# EAGLE board skyshieldv2.2 (EAGLE 7.2.0)
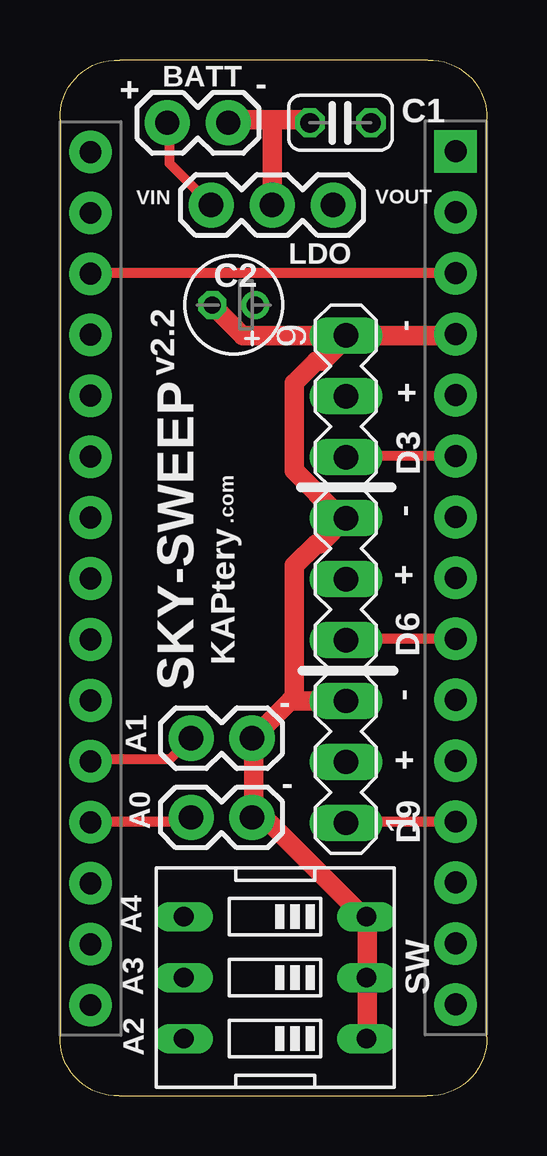
[diagram p0: board, top side]
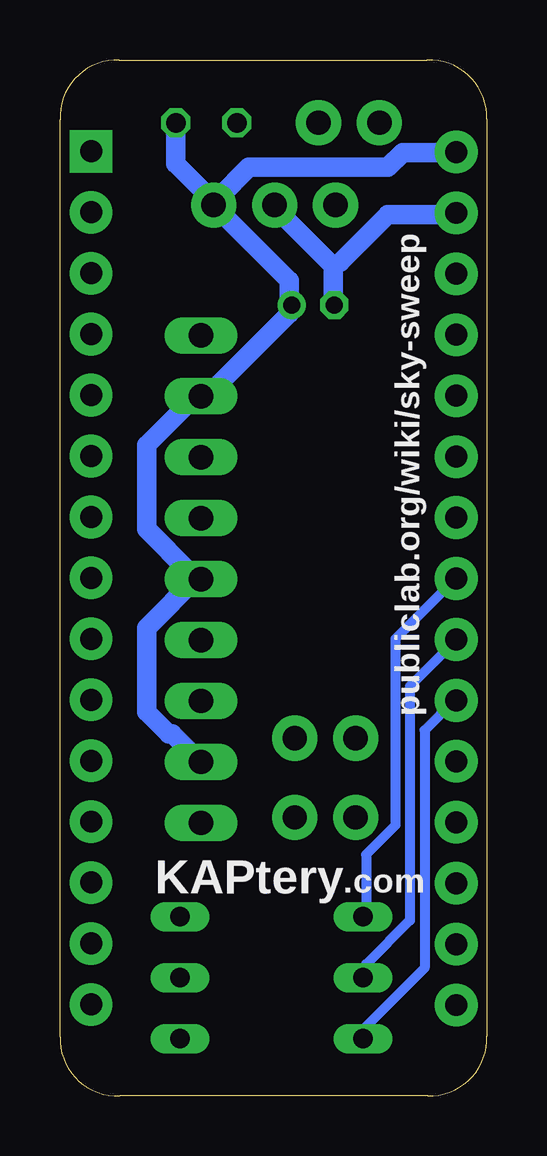
[diagram p1: board, bottom side, seen from below]

Size 17.78 x 43.18 mm. Coordinates in mm from the lower left corner, seen from the top.
Outline: 2.46,0 15.29,0 arc94 17.78,2.46 17.78,40.69 arc94 15.32,43.18 2.49,43.18 arc94 0,40.72 0,2.49 arc94 2.46,0
Copper layers (1*16): Top 0.0356mm / dielectric 1.5011mm / Bottom 0.0356mm
Design rules "LaenPCBOrder": minimum track width 6mil, minimum drill 13mil, track to track 6mil, track to pad 6mil, pad to pad 6mil, via to via 6mil, smd to smd 6mil, copper to edge 15mil, drill to drill 6mil, minimum pad ring 7mil, minimum via ring 7mil, stop-mask expansion 3mil, vias tented up to drill 0mil, thermal gap 10mil
Net classes: 0 default: width 0.406 mm, clearance 0.203 mm; 1 power: width 0.813 mm, clearance 0.203 mm

## Footprints (pad centres in the part's own frame; a part is rotated, then mirrored left to right if it is on the bottom)
1X02 = drill 1.016 pad 1.88: 1 0,0; 2 2.54,0
C025-024X044 = drill 0.813 octagon: 1 -1.27,0; 2 1.27,0
E1,8-4 = drill 0.711 pad 1.168: + -0.889,0 | drill 0.711 pad 1.168 octagon: - 0.889,0
HEAD15-NOSS = drill 0.914 pad 1.778 square: 1 0,0 | drill 0.914 pad 1.778: 2 2.54,0; 3 5.08,0; 4 7.62,0; 5 10.16,0; 6 12.7,0; 7 15.24,0; 8 17.78,0; 9 20.32,0; 10 22.86,0; 11 25.4,0; 12 27.94,0; 13 30.48,0; 14 33.02,0; 15 35.56,0
HEAD15-NOSS-1 = drill 0.914 pad 1.778: 1 0,0; 2 2.54,0; 3 5.08,0; 4 7.62,0; 5 10.16,0; 6 12.7,0; 7 15.24,0; 8 17.78,0; 9 20.32,0; 10 22.86,0; 11 25.4,0; 12 27.94,0; 13 30.48,0; 14 33.02,0; 15 35.56,0
1X03 = drill 1.016 pad 1.88: 1 0,0; 2 2.54,0; 3 5.08,0
MA09-1 = drill 1.016 long: 1 -10.16,0; 2 -7.62,0; 3 -5.08,0; 4 -2.54,0; 5 0,0; 6 2.54,0; 7 5.08,0; 8 7.62,0; 9 10.16,0
EDG-03 = drill 0.813 long: 1 -2.54,-3.81; 2 0,-3.81; 3 2.54,-3.81; 4 2.54,3.81; 5 0,3.81; 6 -2.54,3.81

## Placement (x,y rotation side)
BATT  [1X02]  4.47,40.56 0 top
C1  0.1µ  [C025-024X044]  11.68,40.56 180 top
C2  10µ  [E1,8-4]  7.24,32.97 180 top
CHDKA  [1X02]  8,11.61 180 top
CHDKB  [1X02]  8,14.91 180 top
J1  HEAD15-NOSS  [HEAD15-NOSS]  16.48,39.37 270 top
J2  HEAD15-NOSS-1  [HEAD15-NOSS-1]  1.27,39.34 270 top
LDO-5V  LF50ABV-DG  [1X03]  11.38,37.13 180 top
SV4  [MA09-1]  11.91,21.54 90 top
SW2  [EDG-03]  8.97,4.93 90 top

## Library data of the parts
BATT CHDKA CHDKB LDO-5V = SparkFun-Connectors
C1 C2 = resistor
J1 J2 = MyCON2
SV4 = con-lstb; OC_FARNELL: unknown; OC_NEWARK: unknown
SW2 = special

## Nets
3V3: J2.14
+5V: J2.4
A0: CHDKA.2 J2.12
A1: CHDKB.2 J2.11
A2: J2.10 SW2.6
A3: J2.9 SW2.5
A4: J2.8 SW2.4
A5: J2.7
A6: J2.6
A7: J2.5
AREF: J2.13
D0/RX: J1.2
D1/TX: J1.1
D2: J1.5
D3: J1.6 SV4.7
D4: J1.7
D5: J1.8
D6: J1.9 SV4.4
D7: J1.10
D8: J1.11
D9: J1.12 SV4.1
D10: J1.13
D11/MOSI: J1.14
D12/MISO: J1.15
D13/SCK: J2.15
GND [power]: BATT.2 C1.2 C2.- CHDKA.1 CHDKB.1 J1.4 J2.2 LDO-5V.2 SV4.3 SV4.6 SV4.9 SW2.1 SW2.2 SW2.3
N$6: BATT.1 LDO-5V.3
RESET: J1.3 J2.3
VCC [power]: C1.1 C2.+ J2.1 LDO-5V.1 SV4.2 SV4.5 SV4.8

## Tracks (layer width: path | path; a pad name or v marks a point on that pad's centre or on a via)
A0
  Top 0.406: J2.12 1.37,11.43 5.18,11.43 5.33,11.58 CHDKA.2
A1
  Top 0.406: CHDKB.2 4.57,14.02 1.37,14.02 J2.11
A2
  Bottom 0.406: SW2.6 5.03,2.44 5.03,2.9 2.59,5.33 2.59,15.24 1.37,16.46 J2.10
A3
  Bottom 0.406: SW2.5 5.03,5.03 5.03,5.49 3.2,7.32 3.2,17.07 1.37,18.9 J2.9
A4
  Bottom 0.406: SW2.4 5.03,7.47 5.03,10.06 3.81,11.28 3.81,19.05 1.37,21.49 J2.8
D3
  Top 0.406: J1.6 12.04,26.67 SV4.7
D6
  Top 0.406: J1.9 12.04,19.05 SV4.4
D9
  Top 0.406: J1.12 12.04,11.43 SV4.1
GND
  Top 0.813: SV4.9 16.46,31.7 J1.4 | 8.84,40.69 7.01,40.69 BATT.2 | 8.84,40.69 10.36,40.69 C1.2 | LDO-5V.2 8.84,40.69 | SV4.9 7.62,31.7 C2.- | SW2.1 12.8,2.44 12.8,4.88 SW2.2 12.8,5.33 12.8,7.47 SW2.3 12.5,7.62 8.38,11.73 CHDKA.1 8.08,11.73 8.08,14.63 CHDKB.1 8.08,14.94 9.6,16.46 9.75,16.46 | 9.75,16.46 SV4.3 | 9.75,16.46 9.75,22.1 10.67,23.01 10.82,23.01 11.89,24.08 SV4.6 11.58,24.23 9.75,26.06 9.75,29.72 10.67,30.63 10.97,30.63 11.73,31.39 SV4.9
  Bottom 0.813: 6.4,34.59 6.4,33.07 C2.- | 6.4,34.59 8.84,37.03 LDO-5V.2 | J2.2 1.37,36.73 4.12,36.73 6.1,34.75 6.4,34.59
N$6
  Top 0.406: LDO-5V.3 4.57,38.86 4.57,40.54 BATT.1
RESET
  Top 0.406: J1.3 1.37,34.29 J2.3
VCC
  Bottom 0.813: SV4.2 12.04,14.02 13.11,15.09 13.26,15.09 14.17,16 14.17,19.51 12.04,21.64 SV4.5 12.34,21.79 14.17,23.62 14.17,27.13 12.19,29.11 SV4.8 11.89,29.26 11.58,29.26 8.23,32.61 C2.+ 8.23,33.07 8.23,33.98 LDO-5V.1 | C1.1 12.95,38.86 11.58,37.49 LDO-5V.1 | J2.1 1.37,39.32 3.5,39.32 4.12,38.71 9.91,38.71 11.12,37.49 LDO-5V.1

## Text on the board
tPlace: BATT | + | - | C1 | VIN | VOUT | LDO | C2 | v2.2 | - | + | D3 | - | KAPtery | .com | + | D6 | SKY-SWEEP | - | - | A1 | + | A0 | - | D9 | A4 | A3 | SW | A2
bPlace: publiclab.org/wiki/sky-sweep | KAPtery | .com